# EAGLE board Modelo 0.1 (EAGLE 8.2.2)
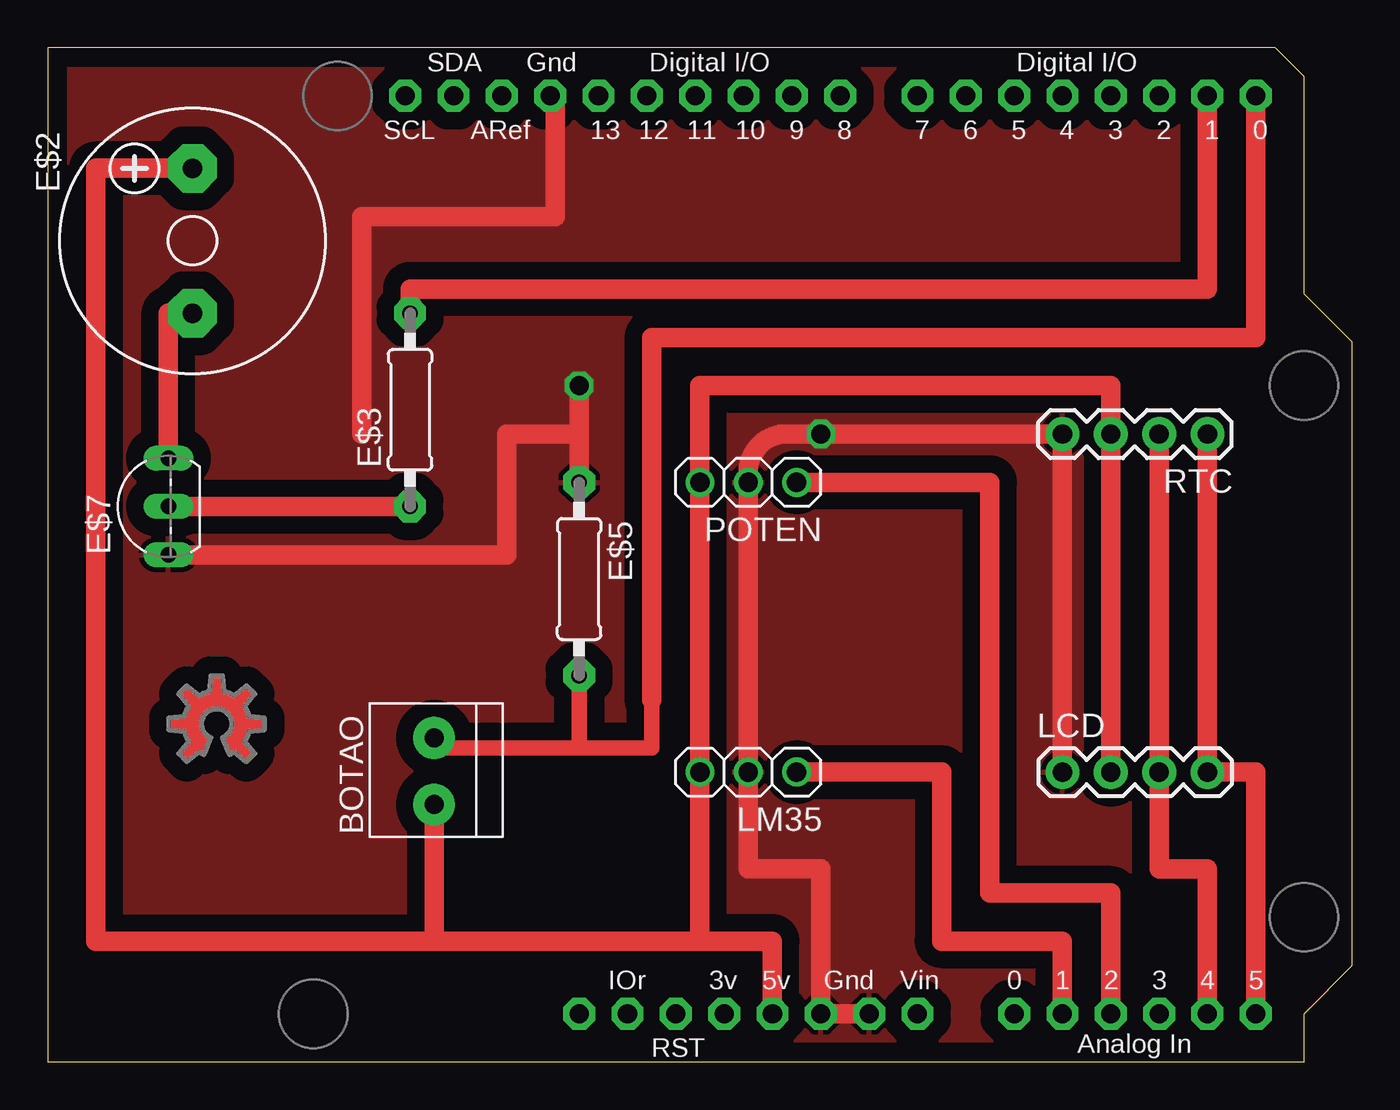
[diagram p0: board, top side]
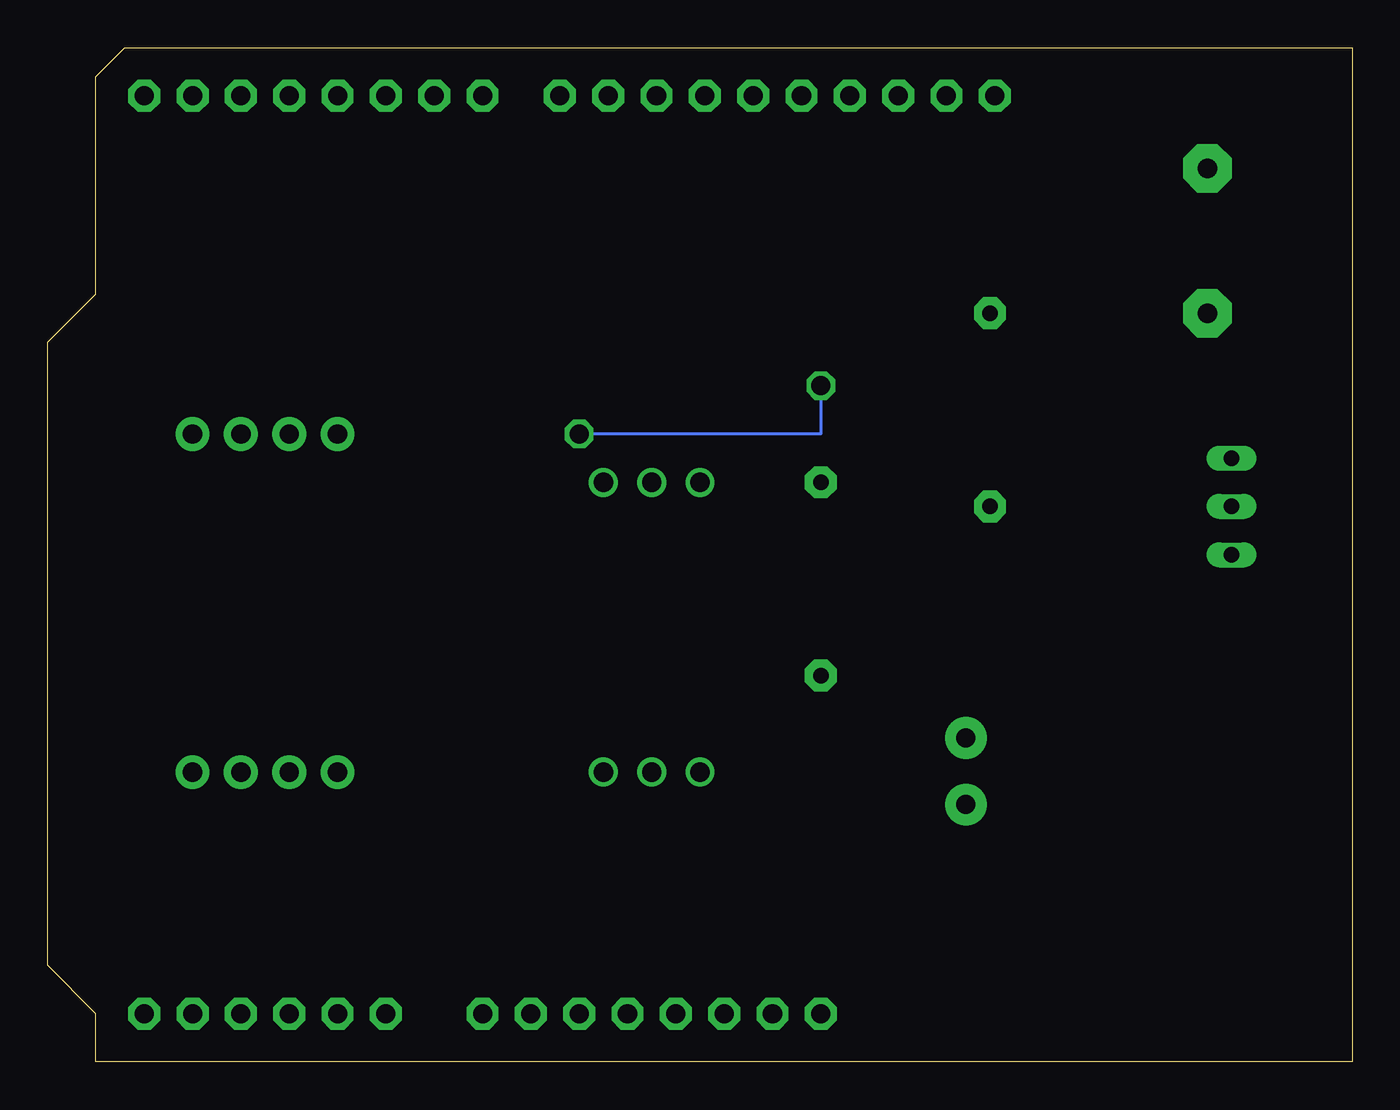
[diagram p1: board, bottom side, seen from below]

Size 68.58 x 53.34 mm. Coordinates in mm from the lower left corner, seen from the top.
Copper layers (1*16): Top 0.035mm / dielectric 1.5mm / Bottom 0.035mm
Design rules "default *": minimum track width 6mil, minimum drill 0.35mm, track to track 36mil, track to pad 36mil, pad to pad 36mil, via to via 36mil, smd to smd 36mil, copper to edge 40mil, drill to drill 6mil, minimum pad ring 10mil, minimum via ring 8mil, stop-mask expansion 4mil, vias tented up to drill 0mil, thermal gap 10mil

## Footprints (pad centres in the part's own frame; a part is rotated, then mirrored left to right if it is on the bottom)
1X2-3.5MM = drill 1 pad 2.184: 1 1.8,0; 2 -1.7,0
ARDUINOR3 = drill 1 pad 1.676 octagon: 3V 35.56,2.54; 5V 38.1,2.54; A0 50.8,2.54; A1 53.34,2.54; A2 55.88,2.54; A3 58.42,2.54; A4 60.96,2.54; A5 63.5,2.54; AREF 23.876,50.8; D0 63.5,50.8; D1 60.96,50.8; D2 58.42,50.8; D3 55.88,50.8; D4 53.34,50.8; D5 50.8,50.8; D6 48.26,50.8; D7 45.72,50.8; D8 41.656,50.8; D9 39.116,50.8; D10 36.576,50.8; D11 34.036,50.8; D12 31.496,50.8; D13 28.956,50.8; GND 26.416,50.8; GND1 43.18,2.54; GND2 40.64,2.54; IOREF 30.48,2.54; RESERVED 27.94,2.54; RESET 33.02,2.54; SCL 18.796,50.8; SDA 21.336,50.8; VIN 45.72,2.54
F/CM12P = drill 1.016 pad 2.54 octagon: + 3.81,0; - -3.81,0
0207/10 = drill 0.813 pad 1.676 octagon: 1 -5.08,0; 2 5.08,0
TO92-EBC-OVAL = drill 0.813 long: B 0,-1.27; C 2.54,-1.27; E -2.54,-1.27
1X04-BIG = drill 1.016 pad 1.778: 1 0,0; 2 2.54,0; 3 5.08,0; 4 7.62,0
1X03 = drill 1.016: 1 -2.54,0; 2 0,0; 3 2.54,0

## Placement (x,y rotation side)
BOTAO  [1X2-3.5MM]  20.32,15.24 90 top
E$1  [ARDUINOR3]  0,0 0 top
E$2  [F/CM12P]  7.62,43.18 90 top
E$3  [0207/10]  19.05,34.29 90 top
E$4  [OSHWLOGO_TOP_0.2]  8.89,17.78 0 top
E$5  [0207/10]  27.94,25.4 270 top
E$7  [TO92-EBC-OVAL]  5.08,29.21 90 top
LCD  [1X04-BIG]  53.34,15.24 0 top
LM35  [1X03]  36.83,15.24 180 top
POTEN  [1X03]  36.83,30.48 180 top
RTC  [1X04-BIG]  60.96,33.02 180 top

## Library data of the parts
BOTAO E$1 E$3-E$5 E$7 LCD LM35 POTEN RTC = adafruit
E$2 = buzzer

## Nets
GND: E$1.GND1 E$1.GND2 E$5.1 E$7.E LCD.1 LM35.2 POTEN.2 RTC.4
S$1: E$1.5V LCD.2 LM35.3 POTEN.3 RTC.3
S$2: E$3.1 E$7.B
S$3: E$1.A1 LM35.1
S$4: E$1.D0 E$5.2
S$5: E$1.D1 E$3.2
S$6: E$1.A2 POTEN.1
S$7: E$1.A5 LCD.4 RTC.1
S$8: E$1.A4 LCD.3 RTC.2
S$9: E$2.- E$7.C

## Tracks (layer width: path | path; a pad name or v marks a point on that pad's centre or on a via)
GND  (via drill 1)
  Top 1.016: E$7.E 24.13,26.67 24.13,33.02 27.94,33.02 | 16.51,33.02 16.51,44.45 26.67,44.45 26.67,50.8 | 27.94,33.02 E$5.1 | 27.94,33.02 v27.94,35.56 | E$1.GND1 E$1.GND2 40.64,10.16 36.83,10.16 LM35.2 POTEN.2 36.83,31.02 arc-90 38.83,33.02 v40.64,33.02 RTC.4 LCD.1
  Bottom 0.152: v27.94,35.56 27.94,33.02 v40.64,33.02
  pour Top: 0,53.34 64.77,53.34 66.04,52.07 66.04,40.64 68.58,38.1 68.58,5.08 66.04,2.54 66.04,0 0,0
S$1
  Top 1.016: E$1.5V 38.1,6.35 34.29,6.35 | 34.29,6.35 LM35.3 POTEN.3 34.29,35.56 55.88,35.56 RTC.3 LCD.2 | 34.29,6.35 20.32,6.35 20.32,12.7
S$2
  Top 1.016: E$7.B E$3.1
S$3
  Top 1.016: E$1.A1 53.34,6.35 46.99,6.35 46.99,15.24 LM35.1
S$4
  Top 0.813: 31.75,19.05 31.75,16.51 27.94,16.51 | 27.94,16.51 20.32,16.51 | E$5.2 27.94,16.51
  Top 1.016: 31.75,19.05 31.75,38.1 63.5,38.1 E$1.D0
S$5
  Top 1.016: E$1.D1 60.96,40.64 19.05,40.64 E$3.2
S$6
  Top 1.016: E$1.A2 55.88,8.89 49.53,8.89 49.53,30.48 POTEN.1
S$7
  Top 1.016: RTC.1 LCD.4 63.5,15.24 E$1.A5
S$8
  Top 1.016: E$1.A4 60.96,10.16 58.42,10.16 LCD.3 RTC.2
S$9
  Top 1.016: E$7.C 6.35,39.37 E$2.-
S$11
  Top 1.016: 6.35,46.99 2.54,46.99 2.54,6.35 21.59,6.35